# Altium PCB old_Sampler_DIOT.PCBDOC (part 3 of 8)
Units mm, origin at the board's own origin, x right, y up, seen from the top; angles counter-clockwise.
Board outline 221.17 x 100 mm, 4 copper layers (Top, GP1(GND), L3, Bot), stack 1.648 mm thick; 664 components, 413 nets, 2128 pads, 926 vias.
Unrouted connection lines stored in the file: 1.
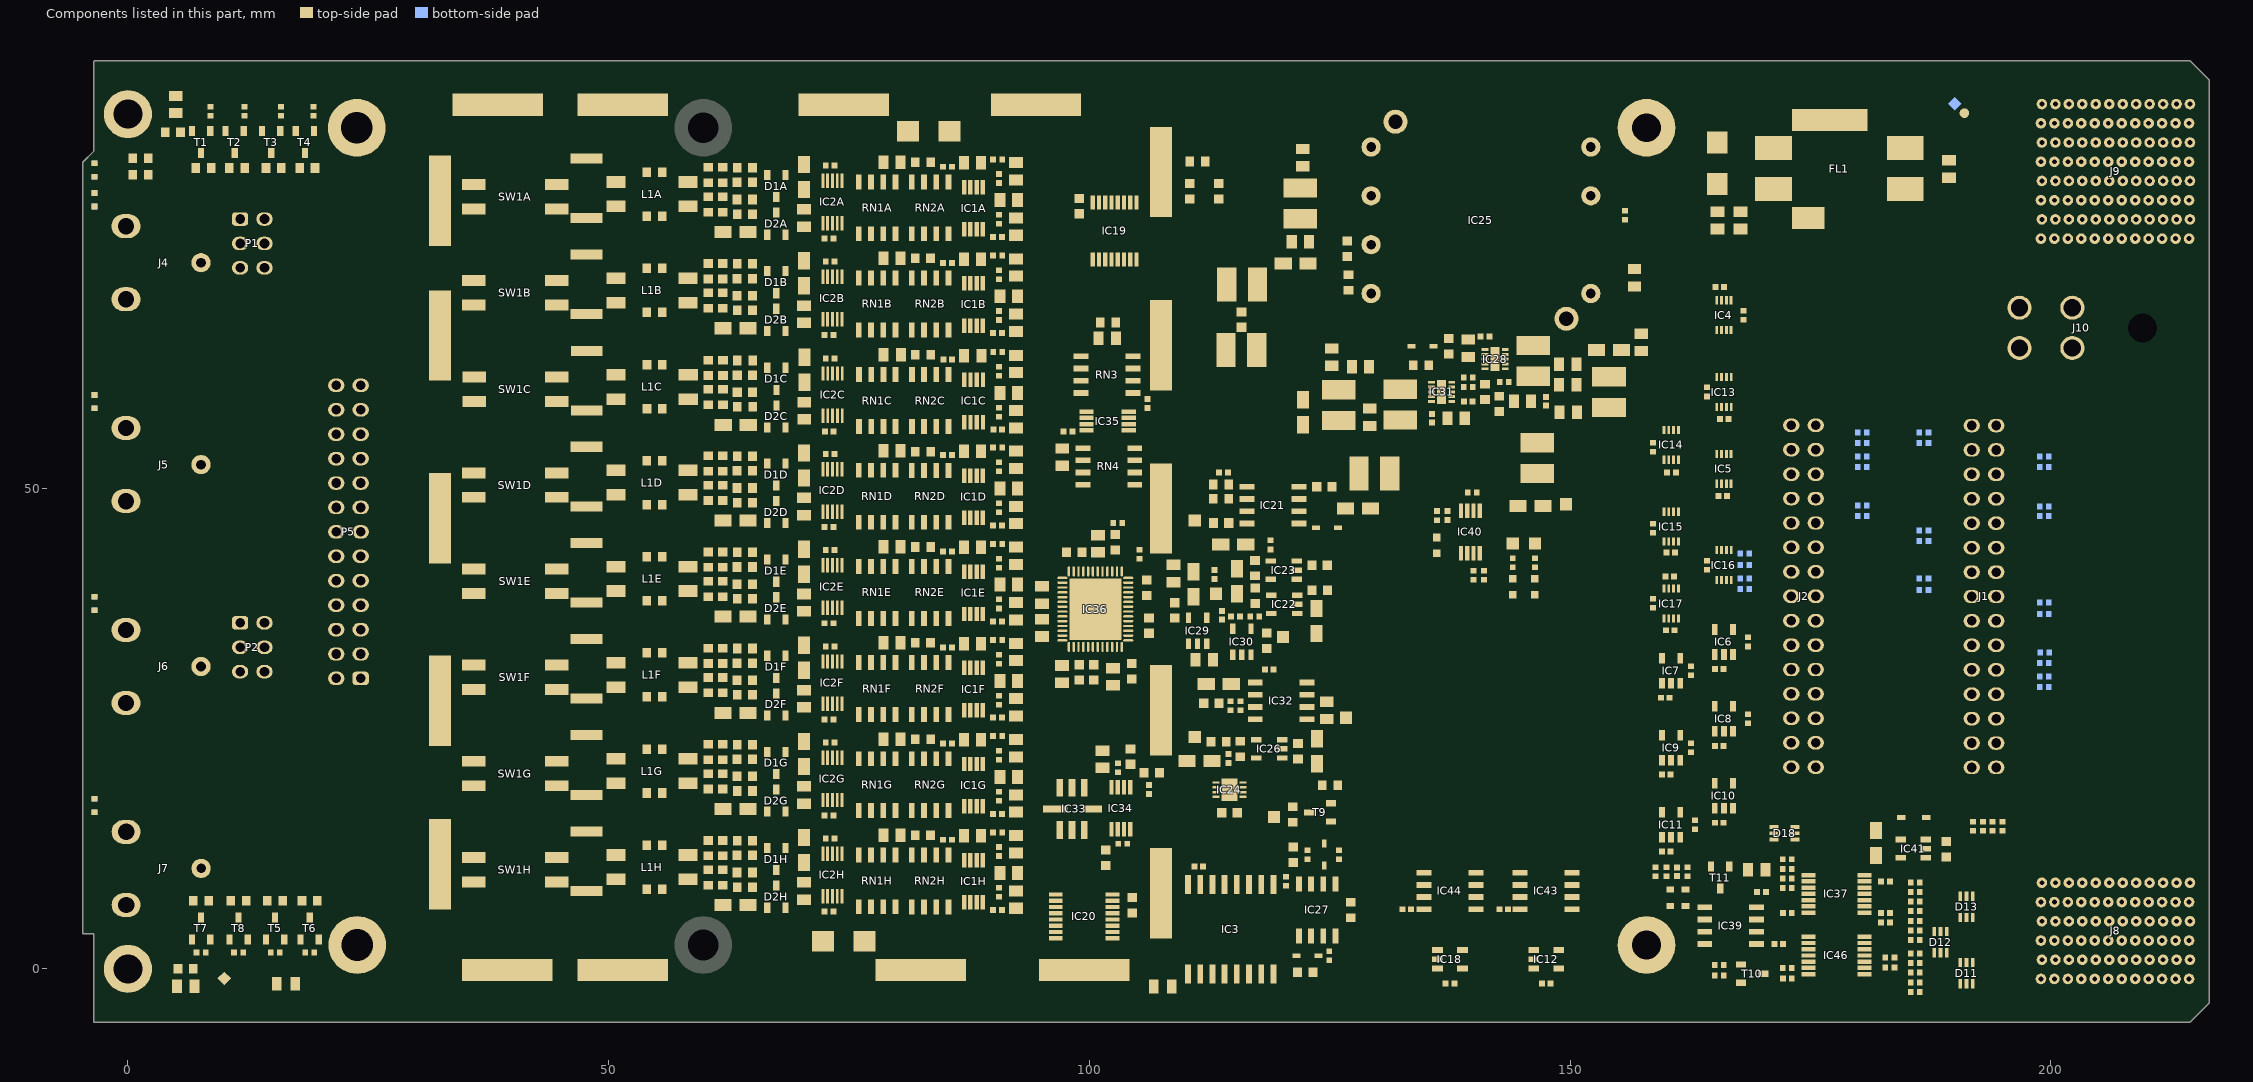
[diagram p4: the components of this part, seen from the top]

## Part data (continued)
IC21 IC32: "1.22V to 20V 500mA, Low Noise, LDO Adjustable Micropower Regulator", Case=SOIC8, Manufacturer="LINEAR TECHNOLOGY", Author="CERN DEM JLC", Bonding=No, ComponentHeight=1.75mm, Component Type=Standard, CreateDate=11.01.2010, Device=LT1763CS8#PBF, HelpURL=\\cern.ch\dfs\Applications\Altium\Datasheets\LT1763CS8#PBF.pdf, LatestRevisionDate=11.01.2010, Manufacturer Part Number=LT1763CS8#PBF, Mounted=Yes, PackageDescription="SOIC 8, Pitch 1.27mm, Body 4x5mm, IPC Medium Density", Part Description="1.22V to 20V 500mA, Low Noise, LDO Adjustable Micropower Regulator", Part Number=LT1763CS8#PBF, Pin Count=8, PressFit=No, Sense=No, SMD=Yes, Socket=No
IC22 IC29: "100mA, Low Noise, LDO Micropower Adjustable Regulator in SOT-23", Case=SOT23-5, Manufacturer="LINEAR TECHNOLOGY", Author="CERN DEM JLC", Bonding=No, Component Type=Standard, ComponentHeight=1mm, CreateDate=26.08.2013, Device=LT1761ES5-SD#TRMPBF, HelpURL=\\cern.ch\dfs\Applications\Altium\Datasheets\LT1761ES5-SD#TRMPBF.pdf, LatestRevisionDate=26.08.2013, Manufacturer Part Number=LT1761ES5-SD#TRMPBF, Mounted=Yes, PackageDescription="SOT23, 0.95mm Pitch; 5 Pin, 1.60mm W X 2.90mm L X 1.00mm H body, IPC Medium Density", Part Description="1.22V to 20V, 100mA, Low Noise, LDO Adjustable Micropower Regulator", Part Number=LT1761ES5-SD#TRMPBF, Pin Count=5, PressFit=No, Sense=No, SMD=Yes, Socket=No
IC23 IC30: "100mA, Low Noise, LDO Micropower Adjustable Regulator in SOT-23", Case=SOT23, Manufacturer="LINEAR TECHNOLOGY", Author="CERN DEM MR", Bonding=No, ComponentHeight=1mm, Component Type=Standard, CreateDate=17.02.2016, Device=LT1761ES5-BYP#TRMPBF, HelpURL=\\cern.ch\dfs\Applications\Altium\Datasheets\LT1761ES5-SD#TRMPBF.pdf, LatestRevisionDate=17.02.2016, Manufacturer Part Number=LT1761ES5-BYP#TRMPBF, Mounted=Yes, PackageDescription="SOT23, 0.95mm pitch; 5 pin, 1.6mm W X 2.9mm L, IPC Medium Density", Part Description="1.22V to 20V, 100mA, Low Noise, LDO Adjustable Micropower Regulator", Part Number=LT1761ES5-BYP#TRMPBF, Pin Count=5, PressFit=No, Sense=No, SMD=Yes, Socket=No
IC24: library part CMP-0476-00219-1, "200 mA, Low Noise, Low Dropout Negative Micropower Regulator, -1.9 to -20 V Vin, Adjustable Vout, 8-pin SON (DD-8), -40 to 125 degC, Pb-Free", Dropout Voltage(V)=0.34, Manufacturer="Linear Technology", Output Voltage=Adj, Shutdown Current(uA)=3, Code_JEDEC=MO-229, ComponentLink1Description="Manufacturer URL", ComponentLink1URL=http://www.linear.com/, ComponentLink2Description=Datasheet, ComponentLink2URL=http://cds.linear.com/docs/en/datasheet/1964fb.pdf, ComponentLink3Description="Package Specification", ComponentLink3URL=http://cds.linear.com/docs/en/packaging/DFN_8_05-08-1698.pdf, DatasheetVersion="Rev. B", Discrete Pass Element=no, Iout(mA)=200, Isupply(mA)=0.03, Mounting Technology="Surface Mount", Noise(uV)=30, Number of Outputs=1, PackageDescription="8-Pin Plastic DFN, Body 3 x 3 mm, Pitch 0.5 mm", PackageReference=DD-8, PackageVersion=Jun-10, PartNumber=LT1964EDD#PBF, PSRR(dB)=54, RoHS=TRUE, Vin Max(V)=-1.9, Vin Min(V)=-20, Vout Max(V)=-1.22, Vout Min(V)=-20
IC25: library part DC/DC_CC6-1212DF-E, "CONV DC/DC 6W DUAL 12V +-12V PCB", Manufacturer="TDK-Lambda Americas Inc.", Author=GK, Bonding=No, ComponentHeight=10.45mm, Component Type=Standard, CreateDate=17.12.2016, Device=CC6-1212DF-E, LatestRevisionDate=17.12.2016, Manufacturer Part Number=CC6-1212DF-E, Mounted=Yes, PackageDescription="CC6 Series, Body 0.900 x 0.831 x 0.335, Regulated", Part Description="CONV DC/DC 6W DUAL 12V +-12V PCB", Part Number=CC6-1212DF-E, Pin Count=7, PressFit=No, Sense=No, SMD=No, Socket=No
IC26: "200mA, Low Noise, Low Dropout Negative Micropower Regulator", Case=SOT23-5, Manufacturer="LINEAR TECHNOLOGY", Author="CERN DEM JLC", Bonding=No, ComponentHeight=1mm, Component Type=Standard, CreateDate=05.05.2009, Device=LT1964ES5-SD#TRMPBF, HelpURL=\\cern.ch\dfs\Applications\Altium\Datasheets\LT1964ES5-SD#TRMPBF.pdf, LatestRevisionDate=05.05.2009, Manufacturer Part Number=LT1964ES5-SD#TRMPBF, Mounted=Yes, PackageDescription="SOT23, 0.95mm pitch; 5 pin, 1.75mm W X 3.00mm L, IPC Medium Density", Part Description="-1.22V to -20V, 200mA, Low Noise, Low Dropout Negative Micropower Regulator", Part Number=LT1964ES5-SD#TRMPBF, Pin Count=5, PressFit=No, Sense=No, SMD=Yes, Socket=No
IC27: "Dual Operational Amplifier", Case=SOIC8, Manufacturer="TEXAS INSTRUMENTS", Author="CERN DEM JLC", Bonding=No, ComponentHeight=1.75mm, Component Type=Standard, CreateDate=22.10.2013, Device=LM393AD, HelpURL=\\cern.ch\dfs\Applications\Altium\Datasheets\LM393AD.pdf, LatestRevisionDate=22.10.2013, Manufacturer Part Number=LM393AD, Mounted=Yes, PackageDescription="SOIC 8, Pitch 1.27mm - Body 4x5mm, IPC Medium Density", Part Description="Dual Differential Comparator", Part Number=LM393AD, Pin Count=8, PressFit=No, Sense=No, SMD=Yes, Socket=No
IC28 IC31: "4.75-28VDC to 1-6VDC, 500mA Step-Down Converter With Sleep Mode", Case=SON10, Manufacturer="TEXAS INSTRUMENTS", Author="CERN DEM JMW", Bonding=No, ComponentHeight=0.8mm, Component Type=Standard, CreateDate=11.08.2015, Device=TPS62175DQC, HelpURL=\\cern.ch\dfs\Applications\Altium\Datasheets\TPS62175DQC.pdf, LatestRevisionDate=11.08.2015, Manufacturer Part Number=TPS62175DQC, Mounted=Yes, PackageDescription="SON, 10-Leads, Body 2x3mm, Pitch 0.5mm, Thermal Pad 0.94x2.5mm, IPC Medium Density", Part Description="4.75-28VDC to 1-6VDC, 500mA Step-Down Converter With Sleep Mode", Part Number=TPS62175DQC, Pin Count=11, PressFit=No, Sense=No, SMD=Yes, Socket=No
IC33: library part REF_LTC6655CHLS8-4.096, "4.096, 1uA Precision Voltage Reference", Case=8-CLCC, Manufacturer="LINEAR TECHNOLOGY", Manufacturer Part Number=LTC6655CHLS8-4.096#PBF, Author=GK, Bonding=No, Component Type=Standard, ComponentHeight=1mm, CreateDate=2011-10-10, Device=LTC6655CHLS8-4.096, HelpURL=\\cern.ch\dfs\Applications\Altium\Datasheets\LT6656ACS6-3.3#TRMPBF.pdf, LatestRevisionDate=2011-10-10, Mounted=Yes, PackageDescription="LCC, 8-Pins, Body 5,00x5,00mmx1,45mm, Pitch 1,27mm, IPC Medium Density", Part Description="4.096V, 0.05%, 10ppm/°C, 1uA Precision Voltage Reference", Part Number=LTC6655CHLS8-4.096#PBF, Pin Count=8, PressFit=No, Sense=No, SMD=Yes, Socket=No
IC34: library part REF_LTC6655, "0.25ppm Noise, Low Drift Precision Buffered Voltage Reference", Case=SSOP8, Manufacturer="LINEAR TECHNOLOGY", Author=GK, Bonding=No, ComponentHeight=1.1mm, Component Type=Standard, CreateDate=07.06.2012, Device=LTC6655BHMS8-4.096#PBF, HelpURL=\\cern.ch\dfs\Applications\Altium\Datasheets\LTC6655BHMS8-5#PBF.pdf, LatestRevisionDate=07.06.2012, Manufacturer Part Number=LTC6655BHMS8-4.096#PBF, Mounted=Yes, PackageDescription="SOP, 8-Leads, Body 3.1x3.1mm (max), Pitch 0.65mm, IPC Medium Density", Part Description="4.096V, 0.25ppm Noise, Low Drift Precision Buffered Voltage Reference", Part Number=LTC6655BHMS8-4.096#PBF, Pin Count=8, PressFit=No, Sense=No, SMD=Yes, Socket=No
IC36: library part ADC_LTC2320HUKG-16, "Octal, 16-Bit, 1.5Msps/Ch  Simultaneous Sampling ADC", Case=QFP48, Manufacturer="LINEAR TECHNOLOGY", Author=GK, Bonding=No, ComponentHeight=0.8, Component Type=Standard, CreateDate=10.01.2017, Device=LTC2320HUKG-16#PBF, HelpURL=\\cern.ch\dfs\Applications\Altium\Datasheets\LTC2335CLX-18#PBF.pdf, LatestRevisionDate=10.01.2017, Manufacturer Part Number=LTC2320HUKG-16#PBF, Mounted=Yes, PackageDescription="QFN, 52-Leads, Body 7.00x8.00mm, Pitch 0.50mm, Thermal Pad 5.41x6.40mm, IPC Low Density", Part Description="Octal, 16-Bit, 1.5Msps/Ch  Simultaneous Sampling ADC", Part Number=LTC2320HUKG-16#PBF, Pin Count=48, PressFit=No, Sense=No, SMD=Yes, Socket=No
IC37 IC46: Case=TSSOP14, Manufacturer="NXP SEMICONDUCTORS", Author="CERN DEM JLC", Bonding=No, Component Type=Standard, ComponentHeight=1.1mm, CreateDate=2014-11-19, Device=74HC4066PW, HelpURL=\\cern.ch\dfs\Applications\Altium\Datasheets\74HC4066PW.pdf, LatestRevisionDate=2014-11-19, Manufacturer Part Number=74HC4066PW, Mounted=Yes, PackageDescription="SOP, 14-Leads, Body 4.4x5mm (max), Pitch 0.65mm, IPC Medium Density", Part Description="Quad Single-Pole Single-Throw Analog Switch", Part Number=74HC4066PW, Pin Count=14, PressFit=No, SMD=Yes, Socket=No, Table="Standard Logic"
IC39: "LinCMOS Timer", Case=SOIC8, Manufacturer="TEXAS INSTRUMENTS", Author="CERN DEM JMW", Bonding=No, Component Type=Standard, ComponentHeight=1.75mm, CreateDate=23.08.2016, Device=TLC555ID, HelpURL=\\cern.ch\dfs\Applications\Altium\Datasheets\TLC555ID.pdf, LatestRevisionDate=23.08.2016, Manufacturer Part Number=TLC555ID, Mounted=Yes, PackageDescription="SOIC 8, Pitch 1.27mm, Body 4x5mm, IPC Medium Density", Part Description="LinCMOS Timer", Part Number=TLC555ID, Pin Count=8, PressFit=No, Sense=No, SMD=Yes, Socket=No
IC40: "Digital Temperature Sensor and Thermal Watchdog with Two-Wire Interface", Case=SSOP8, Manufacturer="TEXAS INSTRUMENTS", Author="CERN DEM JLC", Bonding=No, Component Type=Standard, ComponentHeight=1.09mm, CreateDate=15.10.2012, Device=LM75AIMM/NOPB, HelpURL=\\cern.ch\dfs\Applications\Altium\Datasheets\LM75AIMM-NOPB.pdf, LatestRevisionDate=15.10.2012, Manufacturer Part Number=LM75AIMM/NOPB, Mounted=Yes, PackageDescription="SOP, 0.65mm pitch; 8 pin,3.00mm W X 3.00mm L X 1.09mm H bodyI, PC Medium Density", Part Description="-25° to +100°C ±2°C Digital Temperature Sensor and Thermal Watchdog with Two-Wire Interface", Part Number=LM75AIMM/NOPB, Pin Count=8, PressFit=No, Sense=No, SMD=Yes, Socket=No
IC41: "500mA Peak Output LDO Regulator", Case=SOT23-5, Manufacturer="MICROCHIP TECHNOLOGY", Author="CERN DEM WB", Bonding=No, Component Type=Standard, ComponentHeight=1.45mm, CreateDate=2019-04-16, Device=MIC5219-3.3YM5, HelpURL=\\cern.ch\dfs\Applications\Altium\Datasheets\MIC5219-3.3YM5.pdf, LatestRevisionDate=2019-04-16, Manufacturer Part Number=MIC5219-3.3YM5, Mounted=Yes, PackageDescription="SOT, 0.95mm pitch; 5 pin, 1.60mm W X 2.90mm L X 1.45mm H body, IPC Medium Density", Part Description="3.3V 500mA Peak Output Low Drop-Out  (LDO) Regulator", Part Number=MIC5219-3.3YM5, Pin Count=5, PressFit=No, Sense=No, SMD=Yes, Socket=No
IC43 IC44: "1.7V-5.5V, 2K I2C™ Serial EEPROMs with EUI-48™ Node Identity", Case=SOIC8, Manufacturer="MICROCHIP TECHNOLOGY", Author="CERN DEM MR", Bonding=No, Component Type=Standard, ComponentHeight=1.75mm, CreateDate=19.07.2016, Device=24AA025E48-I/SN, HelpURL=\\cern.ch\dfs\Applications\Altium\Datasheets\24AA025E48-I-SN.pdf, LatestRevisionDate=19.07.2016, Manufacturer Part Number=24AA025E48-I/SN, Mounted=Yes, PackageDescription="SOIC 8, Pitch 1.27mm - Body 4x5mm, IPC Medium Density", Part Description="1.7V-5.5V, 2K I2C™ Serial EEPROMs with EUI-48™ Node Identity", Part Number=24AA025E48-I/SN, Pin Count=8, PressFit=No, Sense=No, SMD=Yes, Socket=No
J1 J2: library part 3M_N2530-6002RB, "Connector 30 Male", Manufacturer=3M, Manufacturer Part Number=N2530-6002RB, Author="CERN DEM JLC", ComponentHeight=10.03mm, Component Type=Standard, CreateDate=11.02.2009, Family="Header 30", HelpURL=\\cern.ch\dfs\Applications\Altium\Datasheets\3M_N2530-6002RB.pdf, LatestRevisionDate=11.08.2009, Mounted=Yes, Part Description="30 Contacts - Straight .100'' x .100'' Low Profile Four-Wall Header, 2500 Series", Part Number=3M_N2530-6002RB, Pin Count=30, PressFit=No, Sense=No, SMD=No, Socket=No, Status=None
J4 J5 J6 J7: library part MOLEX_73251-3150, Manufacturer=MOLEX, Manufacturer Part Number=73251-3150, Author="CERN DEM JLC", Component Type=Standard, CreateDate=19.09.2024, Family=BNC, HelpURL=\\cern.ch\dfs\Applications\Altium\Datasheets\MOLEX_73251-2121.pdf, LatestRevisionDate=19.09.2024, Mounted=Yes, Part Description="RF Connectors / Coaxial Connectors BNC RA PCB RECPT 50 OHM", Part Number=MOLEX_73251-3150, Pin Count=5, PressFit=No, Sense=No, SMD=No, Socket=No, Status=None
J8: library part AMPHENOL_10052825-101LF, "72 Contacts Header, 6 Columns, 4 Pairs per Column", Manufacturer=AMPHENOL, Manufacturer Part Number=10052825-101LF, Author="CERN DEM MR", ClassName=Overlapping, Component Type=Standard, ComponentHeight=15.35mm, ComponentLink1Description=Application, ComponentLink1URL=\\cern.ch\dfs\Applications\Altium\Datasheets\AMPHENOL_10052825-101LF_Application.pdf, CreateDate=19/02/2018, Family="AirMax VS", HelpURL=\\cern.ch\dfs\Applications\Altium\Datasheets\AMPHENOL_10052825-101LF.pdf, LatestRevisionDate=19/02/2018, Mounted=Yes, Part Description="72 Contacts, 2mm Pitch, 6 Columns, 4 Pairs per Column, 4 Walls, Right Angle Header", Part Number=AMPHENOL_10052825-101LF, Pin Count=72, PressFit=Yes, Sense=No, SMD=No, Socket=No, Status=None
J9: library part AMPHENOL_10052838-101LF, "96 Contacts Header, 8 Columns, 4 Pairs per Column", Manufacturer=AMPHENOL, Manufacturer Part Number=10052838-101LF, Author="CERN DEM MR", Component Type=Standard, ComponentHeight=15.35mm, ComponentLink1Description=Application, ComponentLink1URL=\\cern.ch\dfs\Applications\Altium\Datasheets\AMPHENOL_10052838-101LF_Application.pdf, CreateDate=19.02.2018, Family="AirMax VS", HelpURL=\\cern.ch\dfs\Applications\Altium\Datasheets\AMPHENOL_10052838-101LF.pdf, LatestRevisionDate=19.02.2018, Mounted=Yes, Part Description="96 Contacts, 2mm Pitch, 8 Columns, 4 Pairs per Column, 4 Walls, Right Angle Header", Part Number=AMPHENOL_10052838-101LF, Pin Count=96, PressFit=Yes, Sense=No, SMD=No, Socket=No, Status=None
J10: library part MOLEX_39-30-0040, "Connector 4 Male", Manufacturer=MOLEX, Manufacturer Part Number=39-30-0040, Author="CERN DEM JLC", Component Type=Standard, ComponentHeight=11.4mm, CreateDate=2018-10-02, Family="Mini-Fit Jr.™", HelpURL=\\cern.ch\dfs\Applications\Altium\Datasheets\MOLEX_39-30-0040.pdf, LatestRevisionDate=2018-10-02, Mounted=Yes, Part Description="4.20mm (.165\") Pitch Mini-Fit Jr. Header, Dual Row, Right Angle with Snap-in Plastic Peg PCB Lock, 4 Circuits", Part Number=MOLEX_39-30-0040, Pin Count=4, PressFit=No, Sense=No, SMD=No, Socket=No, Status=None
L1A L1B L1C L1D L1E L1F L1G L1H: library part IND_6.5MH_50%_WURTH_WE-SL2-744229, "Inductor Common Mode", Manufacturer="WURTH ELEKTRONIK", Manufacturer Part Number=744229, Power=400mA, Resistance=0.95R, Tolerance=±50%, Author="CERN DEM JLC", ComponentHeight=5.3mm, Component Type=Standard, CreateDate=01.10.2012, HelpURL=\\cern.ch\dfs\Applications\Altium\Datasheets\IND_WURTH_WE-SL2_744229.pdf, LatestRevisionDate=15.10.2012, Mounted=Yes, Part Description="Common Mode SMD Line Filter (WE-SL2 Serie)", Part Number=IND_6.5MH_50%_WURTH_WE-SL2-744229, Pin Count=4, Sense=No, SMD=Yes, Socket=No, Status=None
L2 L3 L4 L5 L6 L7 L8 L9 L10: library part IND_10UH_10%_MURATA-PS_8400, "Inductor With Core", Manufacturer="MURATA POWER SOLUTIONS", Manufacturer Part Number=84103C, Power=950mA, Resistance=0.24R, Tolerance=±10%, Author="CERN DEM JLC", ComponentHeight=2.9mm, Component Type=Standard, CreateDate=02.07.2012, HelpURL=\\cern.ch\dfs\Applications\Altium\Datasheets\IND_MURATA-PS_8400.pdf, LatestRevisionDate=02.07.2012, Mounted=Yes, Part Description="Miniature Surface Mount Power Inductor (8400 Serie)", Part Number=IND_10UH_10%_MURATA-PS_8400, Pin Count=2, Sense=No, SMD=Yes, Socket=No, Status=None
LD6 LD7 LD8: library part LED_KINGBRIGHT_KPH-1608CGCK, "LED Green 1C 2A", Manufacturer=KINGBRIGHT, Manufacturer Part Number=KPH-1608CGCK, Author="CERN DEM JLC", Bonding=No, Color=Green, Component Type=Standard, ComponentHeight=0.65mm, CreateDate=03.07.2017, HelpURL=\\cern.ch\dfs\Applications\Altium\Datasheets\LED_KINGBRIGHT_KPH-1608CGCK.pdf, LatestRevisionDate=03.07.2017, Mounted=Yes, PackageDescription="SMT Green LED, Case 0603, Body L 1.6 x W 0.8mm H 0.65mm", Part Description="SMD Green LED, Case 1.6mmX0.8mm(0603), 0.65mm Thickness", Part Number=LED_KINGBRIGHT_KPH-1608CGCK, Pin Count=2, PressFit=No, Sense=No, SMD=Yes, Socket=No
M1 M2 M3 M4: library part PLATED_HOLE3.0_PAD6.0, "Single Terminal Socket", Author="CERN DEM JLC", Component Type="Standard (No BOM)", ComponentHeight=0mm, CreateDate=26.05.2008, Family="Plated Hole", LatestRevisionDate=26.05.2008, Mounted=No, PackageDescription="Plated Through Hole: Hole Dia.=3.0mm Pad Dia.=6.0mm", Part Description="Plated Through Hole: Hole Dia.=3.0mm Pad Dia.=6.0mm", Part Number=PLATED_HOLE3.0_PAD6.0, Pin Count=1, SMD=No, Socket=No, Status=None, Table=Pads
NUT1 NUT2: library part BOSSARD_BN81-1400401_v, "Nut", Manufacturer=BOSSARD, Manufacturer Part Number="BN81 Art.1400401", Author="CERN DEM JMW", Component Type=Mechanical, ComponentHeight=2.4mm, CreateDate=18.06.2015, HelpURL=\\cern.ch\dfs\Applications\Altium\Datasheets\BOSSARD_BN81-1400401.pdf, LatestRevisionDate=18.06.2015, Mounted=Yes, PackageDescription="M3 Hexagon Nut ~0,8d, DIN 555, Polyamide PA 6.6", Part Description="M3 Hexagon Nut ~0,8d, DIN 555, Polyamide PA 6.6", Part Number=BOSSARD_BN81-1400401_v, Pin Count=0, PressFit=No, Sense=No, SMD=No, Socket=No, Status=None
P1 P2: "WR-PHD Pin Header, THT, Vertical, pitch 2.54mm, 2 Row, 6P", Contact Resistance=20mOhm, Manufacturer="Wurth Elektronik", Operating Temperature Max=105°C, Operating Temperature Min=-40°C, Rated Current=3A, Withstanding Voltage=500V, Working Voltage=250V, Category="Board-to-Board Connectors", ComponentLink1Description="Website Link", ComponentLink1URL=https://www.we-online.com/redexpert/article/61300621121?ad, ComponentLink2Description="Datasheet Link", ComponentLink2URL=https://www.we-online.com/redexpert/spec/61300621121?ad, Gender="Pin Header", Manufacturer Part Number=61300621121, Match Code=WR-PHD, Mount="Through Hole", Number of Pins=6, Number of Rows=2, Orientation=Vertical, Packaging=Bag, Pitch=2.54mm
P5: "WR-PHD Pin Header, THT, Vertical, pitch 2.54mm, 2 Row, 26P", Contact Resistance=20mOhm, Manufacturer="Wurth Elektronik", Operating Temperature Max=105°C, Operating Temperature Min=-40°C, Rated Current=3A, Withstanding Voltage=500V, Working Voltage=250V, Category="Board-to-Board Connectors", ComponentLink1Description="Website Link", ComponentLink1URL=https://www.we-online.com/redexpert/article/61302621121?ad, ComponentLink2Description="Datasheet Link", ComponentLink2URL=https://www.we-online.com/redexpert/spec/61302621121?ad, Gender="Pin Header", Manufacturer Part Number=61302621121, Match Code=WR-PHD, Mount="Through Hole", Number of Pins=26, Number of Rows=2, Orientation=Vertical, Packaging=Bag, Pitch=2.54mm
R1A R1B R1C R1D R1E R1F R1G R1H R8A R8B R8C R8D R8E R8F R8G R8H R41 R42 R56 R86: library part R0603_NO-VALUE, "Resistor", Case=0603, Author="CERN DEM JLC", Component Type=Standard, CreateDate=03.12.2007, HelpURL=Undefined, LatestRevisionDate=13.03.2008, Manufacturer=Undefined, Manufacturer1 ComponentHeight=Undefined, Manufacturer1 Example=Undefined, Manufacturer1 Part Number=Undefined, Manufacturer Part Number=R0603_NO-VALUE, Mounted=No, Part Description="Reserved Footprint For a 0603 (1608) Chip Resistor", Part Number=R0603_NO-VALUE, Pin Count=2, Sense=No, SMD=Yes, Socket=No, Status=None
R2A R2B R2C R2D R2E R2F R2G R2H R9A R9B R9C R9D R9E R9F R9G R9H R46 R47: library part R0603_0R_JUMPER, "Resistor", Case=0603, Manufacturer=GENERIC, Manufacturer1 ComponentHeight=0.55mm, Manufacturer1 Example="NIC COMPONENT", Manufacturer1 Part Number=NRC06Z0, Author="CERN DEM JLC", Component Type=Standard, CreateDate=03.12.2007, HelpURL=\\cern.ch\dfs\Applications\Altium\Datasheets\R0603_NIC_NRC.pdf, LatestRevisionDate=13.03.2008, Manufacturer Part Number=R0603_0R_JUMPER, Mounted=Yes, Part Description="1A (0.05R Max DC Resistance) Zero Ohm Jumper", Part Number=R0603_0R_JUMPER, Pin Count=2, Sense=No, SMD=Yes, Socket=No, Status=Preferred
  R46 R47: PressFit=No
R3A R3B R3C R3D R3E R3F R3G R3H R10A R10B R10C R10D R10E R10F R10G R10H: library part R0603_1K8_1%_0.1W_100PPM, "Resistor - 1%", Case=0603, Manufacturer=GENERIC, Manufacturer1 ComponentHeight=0.55mm, Manufacturer1 Example="NIC COMPONENT", Manufacturer1 Part Number=NRC06F1801TRF, Power=0.1W, Tolerance=±1%, Author="CERN DEM JLC", Component Type=Standard, CreateDate=03.12.2007, HelpURL=\\cern.ch\dfs\Applications\Altium\Datasheets\R0603_NIC_NRC.pdf, LatestRevisionDate=13.03.2008, Manufacturer Part Number=R0603_1K8_1%_0.1W_100PPM, Mounted=Yes, Part Description="General Purpose Thick Film Chip Resistor", Part Number=R0603_1K8_1%_0.1W_100PPM, Pin Count=2, Sense=No, SMD=Yes, Socket=No, Status=Preferred, TC=±100ppm/°C
R4A R4B R4C R4D R4E R4F R4G R4H R11A R11B R11C R11D R11E R11F R11G R11H: library part R0603_100K_1%_0.1W_100PPM, "Resistor - 1%", Case=0603, Manufacturer=GENERIC, Manufacturer1 ComponentHeight=0.55mm, Manufacturer1 Example="NIC COMPONENT", Manufacturer1 Part Number=NRC06F1003TRF, Power=0.1W, Tolerance=±1%, Author="CERN DEM JLC", Component Type=Standard, CreateDate=03.12.2007, HelpURL=\\cern.ch\dfs\Applications\Altium\Datasheets\R0603_NIC_NRC.pdf, LatestRevisionDate=13.03.2008, Manufacturer Part Number=R0603_100K_1%_0.1W_100PPM, Mounted=Yes, Part Description="General Purpose Thick Film Chip Resistor", Part Number=R0603_100K_1%_0.1W_100PPM, Pin Count=2, Sense=No, SMD=Yes, Socket=No, Status=Preferred, TC=±100ppm/°C
R5A R5B R5C R5D R5E R5F R5G R5H: library part R2512_49R9_1%_1W_100PPM_VISHAY_CRCW, "Resistor - 1%", Case=2512, Manufacturer="VISHAY DRALORIC", Manufacturer Part Number=CRCW251249R9FKEG, Power=1W, Tolerance=±1%, Author="CERN DEM JLC", ComponentHeight=0.7mm, Component Type=Standard, CreateDate=22.05.2012, HelpURL=\\cern.ch\dfs\Applications\Altium\Datasheets\R2512_VISHAY_CRCW2512.pdf, LatestRevisionDate=22.05.2012, Mounted=Yes, Part Description="Thick Film Chip Resistor", Part Number=R2512_49R9_1%_1W_100PPM_VISHAY_CRCW, Pin Count=2, PressFit=No, Sense=No, SMD=Yes, Socket=No, Status=None, TC=±100ppm/°C
R6A R6B R6C R6D R6E R6F R6G R6H R12A R12B R12C R12D R12E R12F R12G R12H: library part R0402_51R_1%_0.0625W_100PPM, "Resistor - 1%", Case=0402, Manufacturer=GENERIC, Manufacturer1 ComponentHeight=0.4mm, Manufacturer1 Example="YAGEO PHYCOMP", Manufacturer1 Part Number=232270675109L, Power=0.0625W, Tolerance=±1%, Author="CERN DEM JLC", Component Type=Standard, CreateDate=03.12.2007, HelpURL=\\cern.ch\dfs\Applications\Altium\Datasheets\R0402_Phycomp_RC0402.pdf, LatestRevisionDate=17.10.2012, Manufacturer Part Number=R0402_51R_1%_0.0625W_100PPM, Mounted=Yes, Part Description="General Purpose Thick Film Chip Resistor", Part Number=R0402_51R_1%_0.0625W_100PPM, Pin Count=2, PressFit=No, Sense=No, SMD=Yes, Socket=No, Status="Not Recommended", TC=±100ppm/°C
R7A R7B R7C R7D R7E R7F R7G R7H R51 R54 R61 R64 R67 R83: library part R0603_24K_1%_0.1W_100PPM, "Resistor - 1%", Case=0603, Manufacturer=GENERIC, Manufacturer1 ComponentHeight=0.55mm, Manufacturer1 Example="NIC COMPONENT", Manufacturer1 Part Number=NRC06F2402TRF, Power=0.1W, Tolerance=±1%, Author="CERN DEM JLC", Component Type=Standard, CreateDate=03.12.2007, HelpURL=\\cern.ch\dfs\Applications\Altium\Datasheets\R0603_NIC_NRC.pdf, LatestRevisionDate=13.03.2008, Manufacturer Part Number=R0603_24K_1%_0.1W_100PPM, Mounted=Yes, Part Description="General Purpose Thick Film Chip Resistor", Part Number=R0603_24K_1%_0.1W_100PPM, Pin Count=2, Sense=No, SMD=Yes, Socket=No, Status=Preferred, TC=±100ppm/°C
  R7A R7B R7C R7D R7E R7F R7G R7H R83: PressFit=No
R13A R13B R13C R13D R13E R13F R13G R13H R60: library part R0402_2K4_1%_0.0625W_100PPM, "Resistor - 1%", Case=0402, Manufacturer=GENERIC, Manufacturer1 ComponentHeight=0.4mm, Manufacturer1 Example="YAGEO PHYCOMP", Manufacturer1 Part Number=232270672402L, Power=0.0625W, Tolerance=±1%, Author="CERN DEM JLC", Component Type=Standard, CreateDate=03.12.2007, HelpURL=\\cern.ch\dfs\Applications\Altium\Datasheets\R0402_Phycomp_RC0402.pdf, LatestRevisionDate=17.10.2012, Manufacturer Part Number=R0402_2K4_1%_0.0625W_100PPM, Mounted=Yes, Part Description="General Purpose Thick Film Chip Resistor", Part Number=R0402_2K4_1%_0.0625W_100PPM, Pin Count=2, PressFit=No, Sense=No, SMD=Yes, Socket=No, Status="Not Recommended", TC=±100ppm/°C
R14 R15 R16 R17 R18 R19 R20 R21 R22 R23 R24 R79: library part R0402_100R_1%_0.1W_100PPM, "Resistor - 1%", Case=0402, Manufacturer=GENERIC, Manufacturer1 ComponentHeight=0.4mm, Manufacturer1 Example=PANASONIC, Manufacturer1 Part Number=ERJ2RKF1000X, Manufacturer Part Number=R0402_100R_1%_0.1W_100PPM_50V, Power=0.1W, Tolerance=±1%, Voltage=50V, Author="CERN DEM JLC", Component Type=Standard, CreateDate=12.12.2013, HelpURL=\\cern.ch\dfs\Applications\Altium\Datasheets\R0402_PANASONIC_ERJ2RK.pdf, LatestRevisionDate=03.03.2015, Mounted=Yes, Part Description="General Purpose Thick Film Chip Resistor", Part Number=R0402_100R_1%_0.1W_100PPM, Pin Count=2, Sense=No, SMD=Yes, Socket=No, Status="Not recommended", TC=±100ppm/°C
R25 R27 R29 R31 R33 R36 R39 R43 R59 R102 R103 R104 R105 R106 R107 R109 R113 R115 R118: library part R0402_10K_1%_0.0625W_100PPM, "Resistor - 1%", Case=0402, Manufacturer=GENERIC, Manufacturer1 ComponentHeight=0.4mm, Manufacturer1 Example="YAGEO PHYCOMP", Manufacturer1 Part Number=232270671003L, Power=0.0625W, Tolerance=±1%, Author="CERN DEM JLC", Component Type=Standard, CreateDate=03.12.2007, HelpURL=\\cern.ch\dfs\Applications\Altium\Datasheets\R0402_Phycomp_RC0402.pdf, LatestRevisionDate=17.10.2012, Manufacturer Part Number=R0402_10K_1%_0.0625W_100PPM, Mounted=Yes, Part Description="General Purpose Thick Film Chip Resistor", Part Number=R0402_10K_1%_0.0625W_100PPM, Pin Count=2, Sense=No, SMD=Yes, Socket=No, TC=±100ppm/°C
  R25 R27 R29 R31 R33 R36 R39 R43: Status="Not recommended"
  R59 R102 R103 R104 R105 R106 R107 R109 R113 R115 R118: PressFit=No, Status="Not Recommended"
R26 R28 R30 R32 R34 R35 R37 R38 R40 R44: library part R0603_220R_1%_0.1W_100PPM, "Resistor - 1%", Case=0603, Manufacturer=GENERIC, Manufacturer1 ComponentHeight=0.55mm, Manufacturer1 Example="NIC COMPONENT", Manufacturer1 Part Number=NRC06F2200TRF, Power=0.1W, Tolerance=±1%, Author="CERN DEM JLC", Component Type=Standard, CreateDate=03.12.2007, HelpURL=\\cern.ch\dfs\Applications\Altium\Datasheets\R0603_NIC_NRC.pdf, LatestRevisionDate=13.03.2008, Manufacturer Part Number=R0603_220R_1%_0.1W_100PPM, Mounted=Yes, Part Description="General Purpose Thick Film Chip Resistor", Part Number=R0603_220R_1%_0.1W_100PPM, Pin Count=2, Sense=No, SMD=Yes, Socket=No, Status=Preferred, TC=±100ppm/°C
R48 R90 R91 R92 R93 R94 R95 R96 R97 R98 R99: library part R0402_22R_1%_0.0625W_100PPM, "Resistor - 1%", Case=0402, Manufacturer=GENERIC, Manufacturer1 ComponentHeight=0.4mm, Manufacturer1 Example="YAGEO PHYCOMP", Manufacturer1 Part Number=232270672209L, Power=0.0625W, Tolerance=±1%, Author="CERN DEM JLC", Component Type=Standard, CreateDate=03.12.2007, HelpURL=\\cern.ch\dfs\Applications\Altium\Datasheets\R0402_Phycomp_RC0402.pdf, LatestRevisionDate=17.10.2012, Manufacturer Part Number=R0402_22R_1%_0.0625W_100PPM, Mounted=Yes, Part Description="General Purpose Thick Film Chip Resistor", Part Number=R0402_22R_1%_0.0625W_100PPM, Pin Count=2, PressFit=No, Sense=No, SMD=Yes, Socket=No, Status="Not Recommended"
  R48 R90 R91 R92 R94 R96 R97 R99: TC=±100ppm/°C
R49 R50: library part "R0805_10M_1%_0.125W_100PPM_VISHAY_CRCW e3", "Resistor - 1%", Case=0805, Manufacturer="VISHAY DALE", Manufacturer Part Number=CRCW080510M0FKEA, Power=0.125W, Tolerance=±1%, Author="CERN DEM BC", Component Type=Standard, ComponentHeight=0.5mm, CreateDate=2019-11-12, HelpURL="\\cern.ch\dfs\Applications\Altium\Datasheets\R0805_VISHAY_CRCW e3.pdf", LatestRevisionDate=2019-11-12, Mounted=Yes, Part Description="150V, Standard Thick Film Chip Resistor", Part Number="R0805_10M_1%_0.125W_100PPM_VISHAY_CRCW e3", Pin Count=2, PressFit=No, Sense=No, SMD=Yes, Socket=No, Status=None, TC=±100ppm/°C
R52 R53 R63 R108 R112: library part R0603_2K7_1%_0.1W_100PPM, "Resistor - 1%", Case=0603, Manufacturer=GENERIC, Manufacturer1 ComponentHeight=0.55mm, Manufacturer1 Example="YAGEO PHYCOMP", Manufacturer1 Part Number=RC0603FR-072K7L, Power=0.1W, Tolerance=±1%, Author="CERN DEM JLC", Component Type=Standard, CreateDate=02.05.2011, HelpURL=\\cern.ch\dfs\Applications\Altium\Datasheets\R0603_PHYCOMP_RC0603.pdf, LatestRevisionDate=02.05.2011, Manufacturer Part Number=R0603_2K7_1%_0.1W_100PPM, Mounted=Yes, Part Description="General Purpose Thick Film Chip Resistor", Part Number=R0603_2K7_1%_0.1W_100PPM, Pin Count=2, Sense=No, SMD=Yes, Socket=No, Status=Preferred, TC=±100ppm/°C
  R108 R112: PressFit=No
R55 R65 R69 R74: library part R0402_5K1_1%_0.0625W_100PPM, "Resistor - 1%", Case=0402, Manufacturer=GENERIC, Manufacturer1 ComponentHeight=0.4mm, Manufacturer1 Example="YAGEO PHYCOMP", Manufacturer1 Part Number=232270675102L, Power=0.0625W, Tolerance=±1%, Author="CERN DEM JLC", Component Type=Standard, CreateDate=03.12.2007, HelpURL=\\cern.ch\dfs\Applications\Altium\Datasheets\R0402_Phycomp_RC0402.pdf, LatestRevisionDate=17.10.2012, Manufacturer Part Number=R0402_5K1_1%_0.0625W_100PPM, Mounted=Yes, Part Description="General Purpose Thick Film Chip Resistor", Part Number=R0402_5K1_1%_0.0625W_100PPM, Pin Count=2, PressFit=No, Sense=No, SMD=Yes, Socket=No, Status="Not Recommended", TC=±100ppm/°C
R57 R78 R80 R81 R82 R100 R110 R111 R116 R117 R120 R121 R122 R123 R124 R125 R126 R127 R128 R129 R130 R131 R132 R133 R134 R138 R139 R140 R141 R142 R143 R144 R145 R146 R147 R148 R149 R150 R154 R155 R156 R157: library part R0402_0R_JUMPER, "Resistor", Case=0402, Manufacturer=GENERIC, Manufacturer1 ComponentHeight=0.4mm, Manufacturer1 Example="YAGEO PHYCOMP", Manufacturer1 Part Number=232270591001L, Author="CERN DEM JLC", Component Type=Standard, CreateDate=03.12.2007, HelpURL=\\cern.ch\dfs\Applications\Altium\Datasheets\R0402_Phycomp_RC0402.pdf, LatestRevisionDate=17.10.2012, Manufacturer Part Number=R0402_0R_JUMPER, Mounted=Yes, Part Description="1A (0.05R Max DC Resistance) Zero Ohm Jumper", Part Number=R0402_0R_JUMPER, Pin Count=2, Sense=No, SMD=Yes, Socket=No
  R57 R78 R80 R81 R82 R116 R117: Status="Not recommended"
  R100 R110 R111 R120 R121 R122 R123 R124 R125 R126 R127 R128 R129 R130 R131 R132 R133 R134 R138 R139 R140 R141 R142 R143 R144 R145 R146 R147 R148 R149 R150 R154 R155 R156 R157: PressFit=No, Status="Not Recommended"
R58: library part R0603_36k_1%_0.1W_100PPM, "Resistor - 1%", Case=0603, Manufacturer=GENERIC, Manufacturer1 ComponentHeight=0.55mm, Manufacturer1 Example="NIC COMPONENT", Manufacturer1 Part Number=NRC06F3602TRF, Manufacturer Part Number=R0603_36K_1%_0.1W_100PPM, Power=0.1W, Tolerance=±1%, Author="CERN DEM JLC", Component Type=Standard, CreateDate=03.12.2007, HelpURL=\\cern.ch\dfs\Applications\Altium\Datasheets\R0603_NIC_NRC.pdf, LatestRevisionDate=13.03.2008, Mounted=Yes, Part Description="General Purpose Thick Film Chip Resistor", Part Number=R0603_36K_1%_0.1W_100PPM, Pin Count=2, PressFit=No, Sense=No, SMD=Yes, Socket=No, Status=Preferred, TC=±100ppm/°C
R62 R73: library part R0402_62K_1%_0.0625W_100PPM, "Resistor - 1%", Case=0402, Manufacturer=GENERIC, Manufacturer1 ComponentHeight=0.4mm, Manufacturer1 Example="YAGEO PHYCOMP", Manufacturer1 Part Number=232270676203L, Power=0.0625W, Tolerance=±1%, Author="CERN DEM JLC", Component Type=Standard, CreateDate=03.12.2007, HelpURL=\\cern.ch\dfs\Applications\Altium\Datasheets\R0402_Phycomp_RC0402.pdf, LatestRevisionDate=17.10.2012, Manufacturer Part Number=R0402_62K_1%_0.0625W_100PPM, Mounted=Yes, Part Description="General Purpose Thick Film Chip Resistor", Part Number=R0402_62K_1%_0.0625W_100PPM, Pin Count=2, PressFit=No, Sense=No, SMD=Yes, Socket=No, Status="Not Recommended", TC=±100ppm/°C
R66: library part R0603_270K_1%_0.1W_100PPM, "Resistor - 1%", Case=0603, Manufacturer=GENERIC, Manufacturer1 ComponentHeight=0.55mm, Manufacturer1 Example="NIC COMPONENT", Manufacturer1 Part Number=NRC06F2703TRF, Power=0.1W, Tolerance=±1%, Author="CERN DEM JLC", Component Type=Standard, CreateDate=03.12.2007, HelpURL=\\cern.ch\dfs\Applications\Altium\Datasheets\R0603_NIC_NRC.pdf, LatestRevisionDate=13.03.2008, Manufacturer Part Number=R0603_270K_1%_0.1W_100PPM, Mounted=Yes, Part Description="General Purpose Thick Film Chip Resistor", Part Number=R0603_270K_1%_0.1W_100PPM, Pin Count=2, Sense=No, SMD=Yes, Socket=No, Status=Preferred, TC=±100ppm/°C
R68 R77: library part R0603_82K_1%_0.1W_100PPM, "Resistor - 1%", Case=0603, Manufacturer=GENERIC, Manufacturer1 ComponentHeight=0.55mm, Manufacturer1 Example="NIC COMPONENT", Manufacturer1 Part Number=NRC06F8202TRF, Power=0.1W, Tolerance=±1%, Author="CERN DEM JLC", Component Type=Standard, CreateDate=03.12.2007, HelpURL=\\cern.ch\dfs\Applications\Altium\Datasheets\R0603_NIC_NRC.pdf, LatestRevisionDate=13.03.2008, Manufacturer Part Number=R0603_82K_1%_0.1W_100PPM, Mounted=Yes, Part Description="General Purpose Thick Film Chip Resistor", Part Number=R0603_82K_1%_0.1W_100PPM, Pin Count=2, Sense=No, SMD=Yes, Socket=No, Status=Preferred, TC=±100ppm/°C
R70: library part R0402_51K_1%_0.0625W_100PPM, "Resistor - 1%", Case=0402, Manufacturer=GENERIC, Manufacturer1 ComponentHeight=0.4mm, Manufacturer1 Example="YAGEO PHYCOMP", Manufacturer1 Part Number=232270675103L, Power=0.0625W, Tolerance=±1%, Author="CERN DEM JLC", Component Type=Standard, CreateDate=03.12.2007, HelpURL=\\cern.ch\dfs\Applications\Altium\Datasheets\R0402_Phycomp_RC0402.pdf, LatestRevisionDate=17.10.2012, Manufacturer Part Number=R0402_51K_1%_0.0625W_100PPM, Mounted=Yes, Part Description="General Purpose Thick Film Chip Resistor", Part Number=R0402_51K_1%_0.0625W_100PPM, Pin Count=2, PressFit=No, Sense=No, SMD=Yes, Socket=No, Status="Not Recommended", TC=±100ppm/°C
R71: library part R0402_47K_1%_0.0625W_100PPM, "Resistor - 1%", Case=0402, Manufacturer=GENERIC, Manufacturer1 ComponentHeight=0.4mm, Manufacturer1 Example="YAGEO PHYCOMP", Manufacturer1 Part Number=232270674703L, Power=0.0625W, Tolerance=±1%, Author="CERN DEM JLC", Component Type=Standard, CreateDate=03.12.2007, HelpURL=\\cern.ch\dfs\Applications\Altium\Datasheets\R0402_Phycomp_RC0402.pdf, LatestRevisionDate=17.10.2012, Manufacturer Part Number=R0402_47K_1%_0.0625W_100PPM, Mounted=Yes, Part Description="General Purpose Thick Film Chip Resistor", Part Number=R0402_47K_1%_0.0625W_100PPM, Pin Count=2, PressFit=No, Sense=No, SMD=Yes, Socket=No, Status="Not Recommended", TC=±100ppm/°C
R72: library part R0402_33K_1%_0.0625W_100PPM, "Resistor - 1%", Case=0402, Manufacturer=GENERIC, Manufacturer1 ComponentHeight=0.4mm, Manufacturer1 Example="YAGEO PHYCOMP", Manufacturer1 Part Number=232270673303L, Power=0.0625W, Tolerance=±1%, Author="CERN DEM JLC", Component Type=Standard, CreateDate=03.12.2007, HelpURL=\\cern.ch\dfs\Applications\Altium\Datasheets\R0402_Phycomp_RC0402.pdf, LatestRevisionDate=17.10.2012, Manufacturer Part Number=R0402_33K_1%_0.0625W_100PPM, Mounted=Yes, Part Description="General Purpose Thick Film Chip Resistor", Part Number=R0402_33K_1%_0.0625W_100PPM, Pin Count=2, PressFit=No, Sense=No, SMD=Yes, Socket=No, Status="Not Recommended", TC=±100ppm/°C
R75: library part R0402_20K_1%_0.0625W_100PPM, "Resistor - 1%", Case=0402, Manufacturer=GENERIC, Manufacturer1 ComponentHeight=0.4mm, Manufacturer1 Example="YAGEO PHYCOMP", Manufacturer1 Part Number=232270672003L, Power=0.0625W, Tolerance=±1%, Author="CERN DEM JLC", Component Type=Standard, CreateDate=03.12.2007, HelpURL=\\cern.ch\dfs\Applications\Altium\Datasheets\R0402_Phycomp_RC0402.pdf, LatestRevisionDate=17.10.2012, Manufacturer Part Number=R0402_20K_1%_0.0625W_100PPM, Mounted=Yes, Part Description="General Purpose Thick Film Chip Resistor", Part Number=R0402_20K_1%_0.0625W_100PPM, Pin Count=2, PressFit=No, Sense=No, SMD=Yes, Socket=No, Status="Not Recommended", TC=±100ppm/°C
R76: library part R0603_1K_1%_0.1W_100PPM, "Resistor - 1%", Case=0603, Manufacturer=GENERIC, Manufacturer1 ComponentHeight=0.55mm, Manufacturer1 Example="NIC COMPONENT", Manufacturer1 Part Number=NRC06F1001TRF, Power=0.1W, Tolerance=±1%, Author="CERN DEM JLC", Component Type=Standard, CreateDate=03.12.2007, HelpURL=\\cern.ch\dfs\Applications\Altium\Datasheets\R0603_NIC_NRC.pdf, LatestRevisionDate=13.03.2008, Manufacturer Part Number=R0603_1K_1%_0.1W_100PPM, Mounted=Yes, Part Description="General Purpose Thick Film Chip Resistor", Part Number=R0603_1K_1%_0.1W_100PPM, Pin Count=2, Sense=No, SMD=Yes, Socket=No, Status=Preferred, TC=±100ppm/°C
R101: library part R0402_220R_1%_0.0625W_100PPM, "Resistor - 1%", Case=0402, Manufacturer=GENERIC, Manufacturer1 ComponentHeight=0.4mm, Manufacturer1 Example="YAGEO PHYCOMP", Manufacturer1 Part Number=232270672201L, Power=0.0625W, Tolerance=±1%, Author="CERN DEM JLC", Component Type=Standard, CreateDate=03.12.2007, HelpURL=\\cern.ch\dfs\Applications\Altium\Datasheets\R0402_Phycomp_RC0402.pdf, LatestRevisionDate=17.10.2012, Manufacturer Part Number=R0402_220R_1%_0.0625W_100PPM, Mounted=Yes, Part Description="General Purpose Thick Film Chip Resistor", Part Number=R0402_220R_1%_0.0625W_100PPM, Pin Count=2, PressFit=No, Sense=No, SMD=Yes, Socket=No, Status="Not Recommended", TC=±100ppm/°C
R114: library part R0402_1K6_1%_0.0625W_100PPM, "Resistor - 1%", Case=0402, Manufacturer=GENERIC, Manufacturer1 ComponentHeight=0.4mm, Manufacturer1 Example="YAGEO PHYCOMP", Manufacturer1 Part Number=232270671602L, Power=0.0625W, Tolerance=±1%, Author="CERN DEM JLC", Component Type=Standard, CreateDate=03.12.2007, HelpURL=\\cern.ch\dfs\Applications\Altium\Datasheets\R0402_Phycomp_RC0402.pdf, LatestRevisionDate=17.10.2012, Manufacturer Part Number=R0402_1K6_1%_0.0625W_100PPM, Mounted=Yes, Part Description="General Purpose Thick Film Chip Resistor", Part Number=R0402_1K6_1%_0.0625W_100PPM, Pin Count=2, PressFit=No, Sense=No, SMD=Yes, Socket=No, Status="Not Recommended", TC=±100ppm/°C
R119: library part R0402_1K_1%_0.0625W_100PPM, "Resistor - 1%", Case=0402, Manufacturer=GENERIC, Manufacturer1 ComponentHeight=0.4mm, Manufacturer1 Example="YAGEO PHYCOMP", Manufacturer1 Part Number=232270671002L, Power=0.0625W, Tolerance=±1%, Author="CERN DEM JLC", Component Type=Standard, CreateDate=03.12.2007, HelpURL=\\cern.ch\dfs\Applications\Altium\Datasheets\R0402_Phycomp_RC0402.pdf, LatestRevisionDate=17.10.2012, Manufacturer Part Number=R0402_1K_1%_0.0625W_100PPM, Mounted=Yes, Part Description="General Purpose Thick Film Chip Resistor", Part Number=R0402_1K_1%_0.0625W_100PPM, Pin Count=2, PressFit=No, Sense=No, SMD=Yes, Socket=No, Status="Not Recommended", TC=±100ppm/°C
RN1A RN1B RN1C RN1D RN1E RN1F RN1G RN1H RN2A RN2B RN2C RN2D RN2E RN2F RN2G RN2H RN3 RN4: library part RN_10K_5K_VISHAY_AORN2-1AT3, "DIL8 Resistor Network 4 Resistors 10k-5k-5k-10k 0.1%", Case=SOIC8, Manufacturer="VISHAY DALE", Manufacturer Part Number=AORN2-1AT3, Power=4x0.1W, Tolerance=0.1%, Author="CERN DEM JLC", ComponentHeight=1.73mm, Component Type=Standard, CreateDate=20.02.2017, HelpURL=\\cern.ch\dfs\Applications\Altium\Datasheets\RN_VISHAY_AORN.pdf, LatestRevisionDate=20.02.2017, Mounted=Yes, Part Description="Dual-In-Line Thin Film Precision Automotive Resistors Network, (4 Isolated) - AORN Series", Part Number=RN_10K_5K_VISHAY_AORN2-1AT3, Pin Count=8, PressFit=No, Sense=No, SMD=Yes, Socket=No, TC=±25ppm/°C
SCREW1 SCREW2: library part BOSSARD_BN5687-3061606_v, "Screw", Manufacturer=BOSSARD, Manufacturer Part Number="BN5687 Art.3061606", Author="CERN DEM JLC", Component Type=Mechanical, ComponentHeight=2.4mm, CreateDate=07.02.2013, HelpURL=\\cern.ch\dfs\Applications\Altium\Datasheets\BOSSARD_BN5687-3061606.pdf, LatestRevisionDate=07.02.2013, Mounted=Yes, PackageDescription="M3 L=8mm Hexalobular Socket Pan Head Screw, Fully Threaded - Stainless Steel A2", Part Description="M3 L=8mm Hexalobular Socket Pan Head Screw, Fully Threaded, Stainless Steel A2", Part Number=BOSSARD_BN5687-3061606_v, Pin Count=0, PressFit=No, Sense=No, SMD=No, Socket=No, Status=None
Standoff1 Standoff2: library part SAMTEC_SO-1115-03-02-02-N, "Standoff Male-Female", Manufacturer=SAMTEC, Manufacturer Part Number=SO-1115-03-02-02-N, Author="CERN DEM BC", Component Type=Mechanical, ComponentHeight=11.15mm, CreateDate=21.07.2020, HelpURL=\\cern.ch\dfs\Applications\Altium\Datasheets\SAMTEC_SO-1115-03-02-02-N.pdf, LatestRevisionDate=21.07.2020, Mounted=Yes, PackageDescription="11.15mm Length, Precision Board Stacking Standoff M3 Male/Female", Part Description="11.15mm Length, Precision Board Stacking Standoff M3 Male/Female", Part Number=SAMTEC_SO-1115-03-02-02-N, Pin Count=1, PressFit=No, Sense=No, SMD=No, Socket=No, Status=None
SW1A SW1B SW1C SW1D SW1E SW1F SW1G SW1H: library part SW_CTS_204-121ST, "2x SPST DIP Switch 1NO + 1NF", Manufacturer=CTS, Manufacturer Part Number=204-121ST, Author="CERN DEM JLC", ComponentHeight=10.36mm, Component Type=Standard, CreateDate=28.08.2014, Family=Switch, HelpURL=\\cern.ch\dfs\Applications\Altium\Datasheets\SW_CTS_204-121ST.pdf, LatestRevisionDate=28.08.2014, Mounted=Yes, PackageDescription="Body 7.26 x 9.78mm, 2x SPST DIP, 1NO + 1NF Switch, CTS 204 Series", Part Description="Coupled SPST DIP Switch, 1NO + 1NF, CTS 204 Series", Part Number=SW_CTS_204-121ST, Pin Count=4, PressFit=No, Sense=No, SMD=Yes, Socket=No, Status=None
T1 T2 T3 T4 T5 T6 T7 T8 T9: "N-CHANNEL MOSFET WITH DIODE", Case=SOT23-3, Manufacturer="ON SEMICONDUCTOR", Author="CERN DEM JLC", Bonding=No, ComponentHeight=1.11mm, Component Type=Standard, CreateDate=23.03.2009, Device=BSS138LT1G, HelpURL=\\cern.ch\dfs\Applications\Altium\Datasheets\BSS138LT1G.pdf, LatestRevisionDate=23.03.2009, Manufacturer Part Number=BSS138LT1G, Mounted=Yes, PackageDescription="SOT23 3-Leads, Pitch 0.95mm - Body 1.4x3mm, IPC Medium Density", Part Description="50V 200mA N-Channel Enhancement Mode Field-Effect Transistor", Part Number=BSS138LT1G, Pin Count=3, PressFit=No, Sense=No, SMD=Yes, Socket=No
T10 T11: "N-CHANNEL MOSFET WITH DIODE", Case=SOT23-3, Manufacturer="ON SEMICONDUCTOR", Manufacturer Part Number=BSS138L, Author="CERN DEM JLC", Bonding=No, Component Type=Standard, ComponentHeight=1.11mm, CreateDate=23.03.2009, Device=BSS138LT1G, HelpURL=\\cern.ch\dfs\Applications\Altium\Datasheets\BSS138LT1G.pdf, LatestRevisionDate=25.05.2022, Mounted=Yes, PackageDescription="SOT23, 0.95mm Pitch; 3 Pin, 1.40mm W X 3.00mm L X 1.10mm H body, IPC Medium Density", Part Description="50V, 200mA N-Channel Enhancement Mode Field-Effect Transistor", Part Number=BSS138LT1G, Pin Count=3, PressFit=No, Sense=No, SMD=Yes, Socket=No
TP7 TP8 TP9 TP10 TP11 TP12 TP13: library part SMD_PAD_1.27X1.27MM, Author="CERN DEM JLC", ComponentHeight=0mm, Component Type="Standard (No BOM)", CreateDate=12.01.2008, Family="Test Point", HelpURL=Undefined, LatestRevisionDate=12.01.2008, Mounted=No, PackageDescription="1.27mm x 1.27mm PCB Copper Area (SMD Test Point)", Part Description="1.27mm x 1.27mm PCB Copper Area (SMD Test Point)", Part Number=SMD_PAD_1.27X1.27MM, Pin Count=1, Sense=No, SMD=Yes, Socket=No, Status=None
TP14 TP15: library part SMD_PAD_1.27X1.27MM, "Test Point", Author="CERN DEM JLC", Component Type="Standard (No BOM)", ComponentHeight=0mm, CreateDate=12.01.2008, Family="Test Point", HelpURL=Undefined, LatestRevisionDate=12.01.2008, Mounted=No, PackageDescription="1.27mm x 1.27mm PCB Copper Area (SMD Test Point)", Part Description="1.27mm x 1.27mm PCB Copper Area (SMD Test Point)", Part Number=SMD_PAD_1.27X1.27MM, Pin Count=1, Sense=No, SMD=Yes, Socket=No, Status=None
WASHER1 WASHER2 WASHER3 WASHER4: library part BOSSARD_BN678-1250191_v, "Washer", Manufacturer=BOSSARD, Manufacturer Part Number="BN678 Art.1250191", Author="CERN DEM JLC", Component Type=Mechanical, ComponentHeight=0.5mm, CreateDate=15.01.2013, HelpURL=\\cern.ch\dfs\Applications\Altium\Datasheets\BOSSARD_BN678-1250191.pdf, LatestRevisionDate=11.12.2013, Mounted=Yes, PackageDescription="Waved Spring Washer for M3 Screw, Stainless Steel A2 / 1.4310", Part Description="Waved Spring Washer for M3 Screw, Stainless Steel A2 / 1.4310", Part Number=BOSSARD_BN678-1250191_v, Pin Count=0, PressFit=No, Sense=No, SMD=No, Socket=No, Status=Obsolete, Status Comment="Replaced by BOSSARD_BN83728-8243964_v"

## Free pads (board coordinates)
  round 6 hole 3.2: 0(59.844,2.48) 1(59.844,87.48)

## Via types
v1: diameter 0.5, hole 0.2, Top to Bot, tented both sides, 694 vias
v2: diameter 0.5, hole 0.2, Top to Bot, 186 vias
v3: diameter 0.6, hole 0.3, Top to Bot, tented both sides, 24 vias
v4: diameter 1, hole 0.6, Top to Bot, tented both sides, 12 vias
v5: diameter 0.6, hole 0.3, Top to Bot, 6 vias
v6: diameter 0.406, hole 0.203, Top to Bot, 2 vias
v7: diameter 1.27, hole 0.711, Top to Bot, 2 vias